# Altium PCB 1-10V_PIR_V1.0.PcbDoc (part 2 of 2)
Units mil, origin at the board's own origin, x right, y up, seen from the top; angles counter-clockwise.
Board outline 1736.22 x 1720.47 mil, 4 copper layers (Top Layer, Layer 1, Layer 2, Bottom Layer), stack 61.811 mil thick; 71 components, 58 nets, 292 pads, 69 vias.
Unrouted connection lines stored in the file: 118.
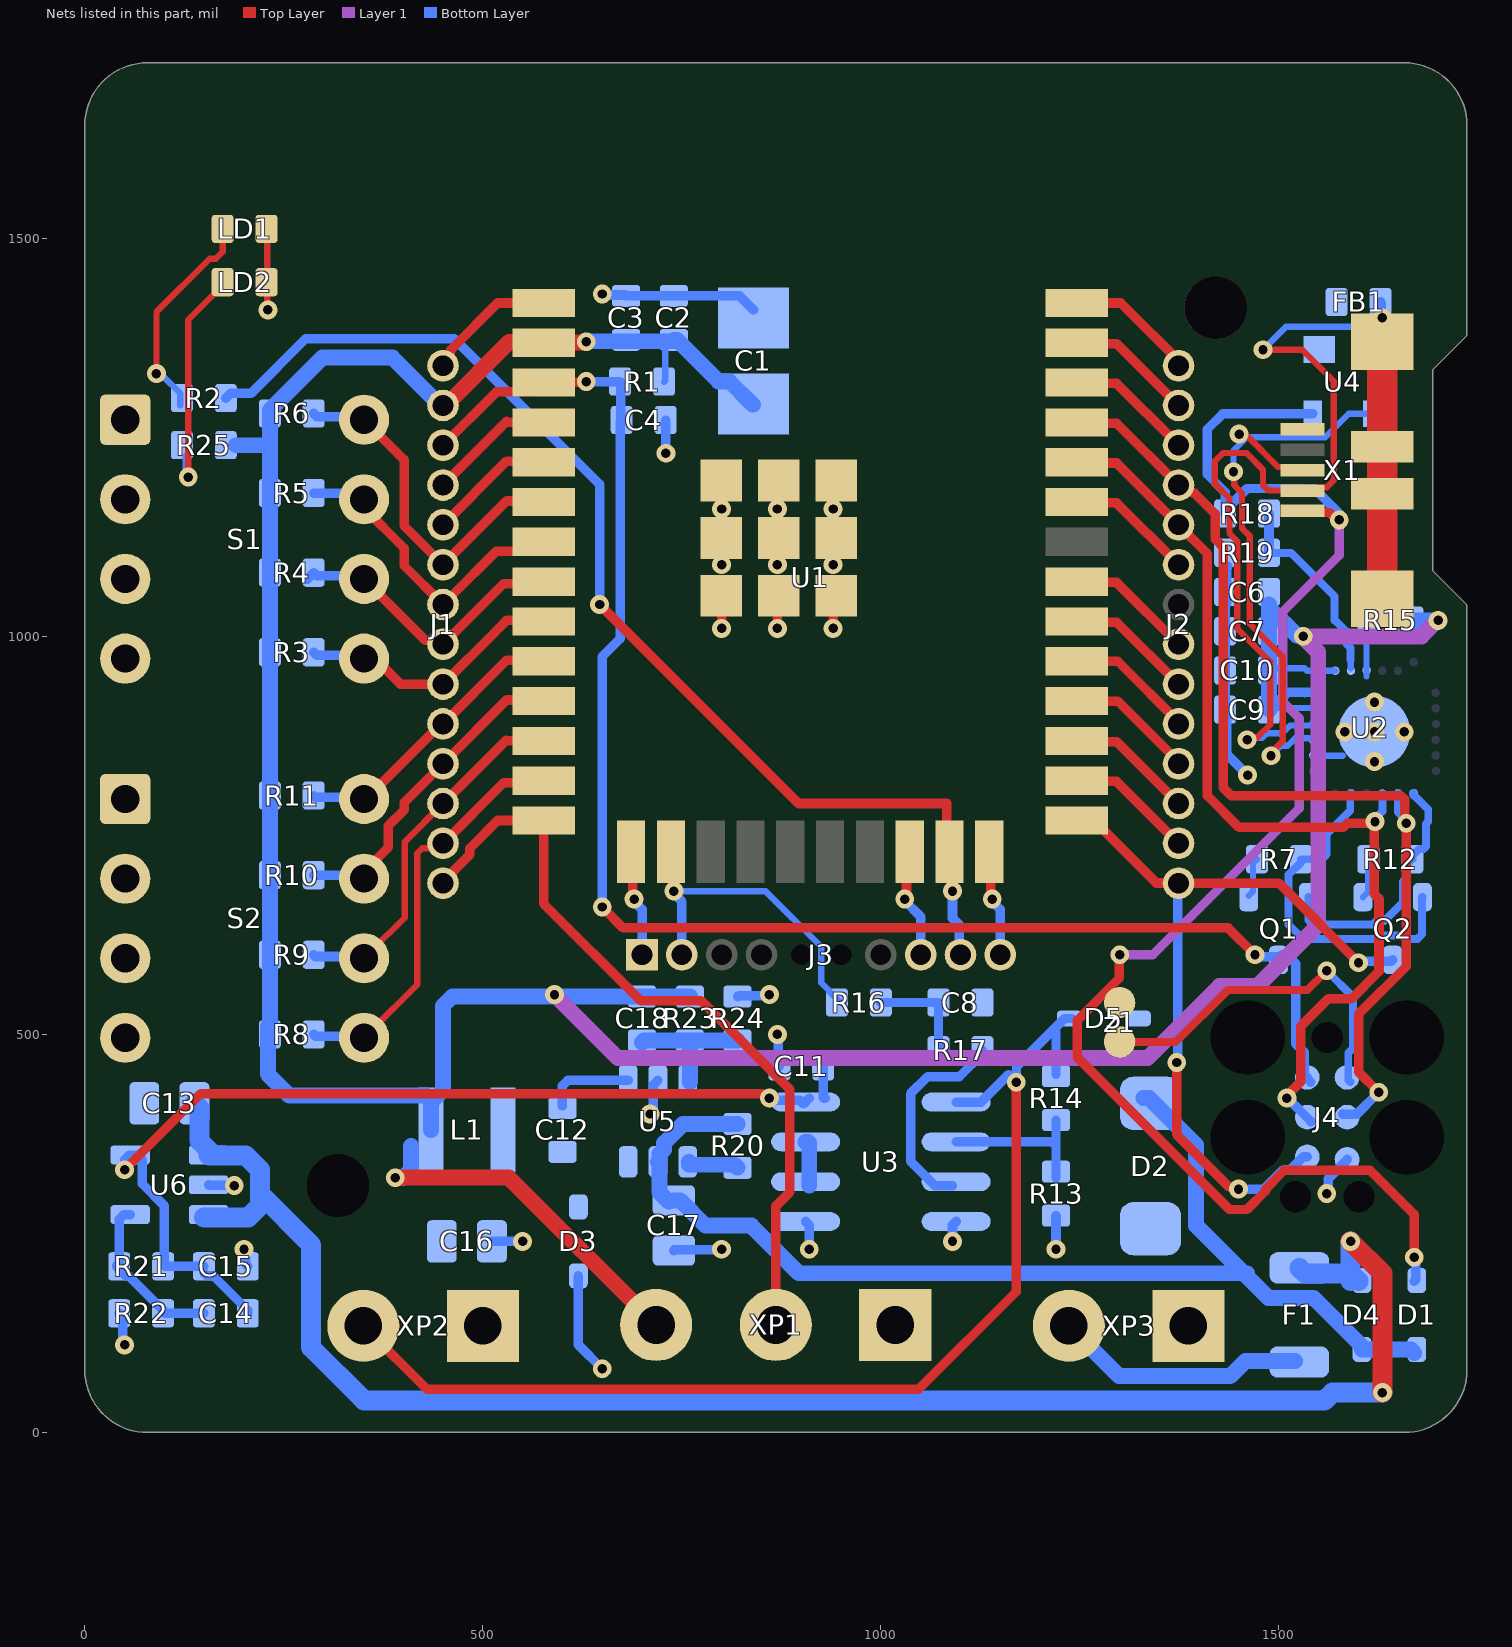
[diagram p4: the nets of this part, all layers, seen from the top]

## Part data (continued)
U4: library part PRTR5V0U2X_Protect, "ESD Protection Device, TVS, 7.5 V, SOT-143B, 4 Pins, 5.5 V, PRTR5", Manufacturer="NXP Semiconductor", Operating Temperature Range="-40C to 80C", Vbr Breakdown Voltage="6Vmin to 9Vmax", Working Voltage=5V, Digikey Link=https://www.digikey.com/product-detail/en/nexperia-usa-inc/PRTR5V0U2X215/1727-3884-1-ND/1589981, ESD Protection="up to 8kV", Farnell Link=http://uk.farnell.com/nexperia/prtr5v0u2x/diode-tvs-dual-sot-143b/dp/1524157?st=PRTR5V0U2X, Manufacturer Part Number=PRTR5V0U2X, Mouser Link=https://eu.mouser.com/ProductDetail/Nexperia/PRTR5V0U2X215?qs=sGAEpiMZZMvKM5ialpXrmha212gV%252bN%252bb, PatternType=SOT143B
U5: "DC-DC Switching Buck (Step Down) Regulator, 3.3V-36V in, 800mV to 28.8V out, 600mA, 2MHz, TSOT-23-6", Manufacturer=MPS, Working Voltage=3.3V-36V, Manufacturer Part Number=MP2451DJ-LF-Z
U6: "LDO, ADJ, 0.15A, Input Voltage Max 38V, -40 TO 125DEG C", Manufacturer=Onsemi, Mouser Part Number=863-NCV8730ASNADJT1G, Working Voltage=2.7V-38V, Arrow Part Number=NCV8730ASNADJT1G, Arrow Price/Stock=https://www.arrow.com/en/products/ncv8730asnadjt1g/on-semiconductor?region=nac, Datasheet Link=https://www.arrow.com/en/products/ncv8730asnadjt1g/on-semiconductor, Height=1.1mm, Manufacturer Part Number=NCV8730ASNADJT1G, Mouser Price/Stock=https://www.mouser.co.uk/ProductDetail/onsemi/NCV8730ASNADJT1G?qs=GedFDFLaBXFZJgT1iqVkOg%3D%3D
X1: "USB Connector, Micro USB Type AB, USB 2.0, Receptacle, 5 Ways, Surface Mount, Right Angle", Manufacturer=GTC, Operating Temperature Range="-30 to 85 ℃", Working Voltage=30VAC/DC, Farnell Link=https://uk.farnell.com/search?st=USB3085, Manufacturer Part Number=USB3085-30-A, PatternType=USB3085-30-A
XP1: library part "MC 1,5/ 3-G-3,81", "Terminal Block, Header, 3.81 mm, 3 Ways, 8 A, 160 V, Through Hole Right Angle", Case="MC 1,5_3-G-3,81", Manufacturer="PHOENIX CONTACT", Permitted current=8A, Temperature="-40 - +105 C", Component Type=Standard, ComponentLink2Description=Datasheet, Manufacturer Part Number="MC 1,5/ 3-G-3,81", Part Number="MC 1,5/ 3-G-3,81", Pb Free=Yes, Pins number=3, Published=14.11.2013, Publisher=dlegkobyt, Status=CHECKED
XP2 XP3: library part "MC 1,5/ 2-G-3,81", "Terminal Block, Header, 3.81 mm, 2 Ways, 8 A, 160 V, Through Hole Right Angle", Case="MC 1,5_2-G-3,81", Manufacturer="PHOENIX CONTACT", Permitted current=8A, Temperature="-40 - +105 C", Component Type=Standard, ComponentLink2Description=Datasheet, Manufacturer Part Number="MC 1,5/ 2-G-3,81", Part Number="MC 1,5/ 2-G-3,81", Pb Free=Yes, Pins number=2, Published=14.11.2013, Publisher=dlegkobyt, Status=CHECKED
z1: library part JUMPER_OPEN

## Free pads (board coordinates)
  round 78.74 hole 78.74 unplated: 11(318.14,310.27) 11(1420.5,1412.63)

## Via types
v1: diameter 23.62, hole 11.81, Top Layer to Bottom Layer, tented both sides, 69 vias

## Nets (pads, with @x,y where several pads share a name; then routed paths per layer and width w, separated by ;. In a path a pad name is that pad's centre, name@x,y a point inside that pad or via, vN(x,y) a via of type N, cw(c..) or ccw(c..) an arc to the next point about the centre after c; other vN are vias at no path point)
1-10V: D5.1 R14.2 U3.1 XP2.2 | length 1413.1
  Top Layer w11.81: XP2.2@350,130 353.86,130 429.45,54.41 1047.57,54.41 1170,176.84 v1(1170,440)
  Bottom Layer w11.81: U3.1@1094.49,415 1125.79,415 1160.39,449.61 ; v1(1170,440) 1170.39,440.39 1170.39,459.61 1230.79,520 D5.1@1236.69,520 D5.1@1240,520 ; R14.2@1220,450 1220,503.31
+3.3VD: C1.1 C2.1 C3.1 C6.1 C7.1 C9.1 C10.1 C16.1 C18.2 J1.2 L1.2 R1.2 R3.2 R4.2 R5.2 R6.2 R8.2 R9.2 R10.2 R11.2 R15.2 R23.2 R25.2 U1.2 U2.5 U2.6 U2.7 XP1.3 | length 4850.6
  Top Layer w20: v1(390,320) 532.7,320 XP1.3@717.72,134.99 ; J1.2@444.65,1290 J1.2@450,1290 453.39,1290 533.39,1370 575.28,1370 U1.2@576.58,1368.69 577.24,1369.35 629.35,1369.35 v1(630,1370)
  Layer 1 w20: v1(590,550) 669.69,470.32 1335.15,470.32 1425.52,560.69 1472.67,560.69 1549.37,637.39 1549.37,980.15 1530,999.52 v1@1530,1000 ; v1(1530.5,1000) 1679.02,1000 1699.02,1020 v1(1700,1020)
  Bottom Layer w8: R1.2@727.56,1320 728.99,1321.43 728.99,1368.99 C2.1@730,1370 ; C9.1@1488.08,907.95 1490.1,909.97 1542.78,909.97 U2.5@1543.23,909.53 ; C10.1@1490,960 1532.09,960 1535.32,956.77 U2.7@1570.79,956.77
  Bottom Layer w12: C9.1@1488.08,907.95 1488.08,911.89 1495.86,919.67 1500.68,919.67 1508.69,927.68 1508.69,930 U2.6@1532.4,930 ; U2.6@1532.4,929.21 U2.6@1532.4,930 ; 1540,930 U2.6@1532.4,930
  Bottom Layer w20: R25.2@190,1240 232.44,1240 ; R8.2@230,510 230,450 256.85,423.15 428.98,423.15 434.72,417.4 L1.2@434.72,414.72 ; R8.2@232.44,510 R9.2@232.44,600 R10.2@232.44,700 R11.2@232.44,800 R3.2@232.44,980 R4.2@232.44,1080 232.44,1240 ; v1(390,320) 400,320 410,330 410,360 ; L1.2@434.72,380 L1.2@434.72,414.72 ; J1.2@450,1290 446.61,1290 386.61,1350 298.5,1350 232.44,1283.94 R6.2@232.44,1280 232.44,1240 ; v1@590,547.56 461.72,547.56 450,535.84 450,430 L1.2@434.72,414.72 ; v1(590,550) 590.98,550 593.42,547.56 C18.2@700,547.56 R23.2@760,547.56 ; v1(630,1370) 630.69,1370.69 C2.1@739.31,1370.69 ; C2.1@740,1372.44 743.94,1372.44 796.26,1320.12 809.88,1320.12 C1.1@839.13,1290.87 ; C6.1@1487.56,1040 1487.56,1036.06 ; C9.1@1488.08,907.95 1488.08,920.07 1487.56,920.59 1487.56,1036.06 ; v1(1530.5,1000) 1529.81,1000.69 1522.93,1000.69 1487.56,1036.06 ; R15.2@1670,1020 v1(1700,1020)
+5V_USB: D1.2 R18.2 U4.4 X1.1 z1.1 | length 1965.9
  Top Layer w11.81: v1(1300,600) 1299.45,599.45 1299.45,570.47 1246.85,517.87 1246.85,471.13 1437.96,280.02 1459.84,280.02 1483.32,303.51 1483.32,305.94 1506.81,329.43 1614.45,329.43 1670,273.88 v1(1670,220) ; X1.1@1529.53,1157.48 1531.5,1155.51 1563.5,1155.51 1572.69,1146.32 v1(1575.89,1146.32)
  Layer 1 w11.81: v1(1300,600) 1341.52,600 1525.59,784.07 1525.59,897.08 1504.91,917.76 1504.91,1030.77 1575.89,1101.75 v1(1575.89,1146.32)
  Bottom Layer w11.81: R18.2@1432.44,1154.17 R18.2@1432.44,1158.11 ; U4.4@1542.6,1279.65 1429.65,1279.65 1410,1260 1410,1203.51 1432.44,1181.06 R18.2@1432.44,1158.11 ; v1@1580,1150 1544.33,1185.67 1460,1185.67 R18.2@1432.44,1158.11 ; D1.2@1670,190 1671.61,191.61 1671.61,218.39 v1(1670,220)
+12V: C11.1 C14.1 C15.1 R21.2 U3.8 U6.5 | length 1261.8
  Top Layer w11.81: v1(50,330) 145.59,425.59 851.21,425.59 856.8,420 v1(860,420)
  Bottom Layer w11.81: v1(50,330) 50,342.52 55.91,348.43 U6.5@57.09,348.43 66.34,348.43 72.24,342.52 72.24,312.29 100,284.54 100,210 101.34,208.66 C15.1@149.61,208.66 ; C15.1@150,200 153.15,196.85 161.42,196.85 204.72,153.54 C14.1@204.72,149.61 ; v1(860,420) 863.2,420 865.94,417.26 898.22,417.26 902.74,412.74 U3.8@910,420 ; C11.1@927.56,460 927.56,420.46 928.02,420 U3.8@930,420
+24V: C13.1 D4.2 F1.2 U6.1 U6.3 | length 2192.2
  Top Layer w25: v1(1590,240) 1630,200 v1(1630,50)
  Bottom Layer w25: C13.1@137.8,413.39 144,407.19 144,366 U6.1@158.54,351.46 ; U6.3@150,270 205.36,270 220,284.64 220,300 ; U6.1@155.51,348.43 156.2,347.74 202.26,347.74 220,330 220,300 ; F1.2@1525.59,206.69 1532.78,199.51 1590,199.51 ; 1590,190 1590,199.51 ; v1(1590,240) 1590,199.51 ; D4.2@1595,195 D4.2@1600,190 ; v1(1630,50) 1567.14,50 1557.48,40.33 350.68,40.33 284.35,106.67 284.35,235.65 220,300
+24V_IN: F1.1 XP3.2 | length 317.9
  Bottom Layer w20: XP3.2@1236.22,133.86 1299.37,70.71 1438.9,70.71 1458.19,90 F1.1@1520,90
ADJ: C14.2 R21.1 R22.2 U6.4 | length 206.7
  Bottom Layer w11.81: R21.1@40,210 40,208.03 51.18,196.85 55.12,196.85 R22.2@98.43,153.54 ; R21.1@43.31,210 43.31,267.72 49.21,273.62 U6.4@57.09,273.62 ; R22.2@100,150 100.39,149.61 C14.2@149.61,149.61
BOOT: J2.14 J4.6 Q2.3 U1.25 | length 999
  Top Layer w12: U1.25@1245.87,768.69 1267.53,768.69 1346.04,690.19 J2.14@1383.92,690.19 ; v1(1371.55,464.73) 1371.55,374.41 1438.12,307.83 1447.01,307.83 v1(1449.24,305.61) ; J2.14@1383.92,690 1500,690 v1(1600,590)
  Bottom Layer w12: J2.14@1370,690 1372.73,687.27 1372.73,465.92 v1(1371.55,464.73) ; v1(1449.24,305.61) 1480.92,305.61 1504.83,329.52 1513.92,329.52 1530.46,346.06 J4.6@1535.63,346.06 ; v1(1600,590) 1601.83,591.83 1641.06,591.83 Q2.3@1642.89,593.66
BST: C12.2 U5.1 | length 110.9
  Bottom Layer w11.81: C12.2@600,410 600,435.44 606.92,442.36 U5.1@682.6,442.36
DTR: Q2.2 R7.2 U2.23 | length 438.9
  Bottom Layer w10: U2.23@1590.47,803.23 1590.47,803.06 1589.57,802.15 1589.57,781.16 1560,751.6 1560,725.86 1554.14,720 R7.2@1527.56,720 1527.56,716.06 1512.29,700.79 1512.29,637.71 1530,620 1624.98,620 1629.2,624.22 1656.57,624.22 1660.79,620 1674.14,620 1680,625.86 Q2.2@1680,670 ; Q2.2@1680,672.4 Q2.2@1680.29,672.37
EN: C4.1 J1.3 J4.2 Q1.3 R1.1 U1.3 | length 1991.7
  Top Layer w12: J1.3@440,1240 J1.3@445,1245 ; J1.3@450,1240 516.98,1306.98 564.87,1306.98 U1.3@576.58,1318.69 577.24,1319.35 629.35,1319.35 v1(630,1320) ; v1(650,660) 676.24,633.76 1436.24,633.76 v1(1470,600)
  Bottom Layer w12: v1(630,1320) R1.1@670,1320 ; v1(650,660) 650,974.49 672.44,996.93 672.44,1269.66 C4.1@674.46,1271.68 673.45,1272.69 673.45,1318.99 R1.1@672.44,1320 ; v1(1470,600) 1472.22,597.78 1497.28,597.78 1499.57,595.49 1504.09,600 1510,600 1521.26,588.74 1521.26,488.12 1531.97,477.4 1531.97,449.72 J4.2@1535.63,446.06 ; J4.2@1534.78,445.22 J4.2@1540,440
EN1: R20.2 U5.4 | length 66.1
  Bottom Layer w20: U5.4@759.21,340 759.21,336.22 816.22,336.22 R20.2@820,332.44
FB: C18.1 R23.1 R24.1 U5.3 | length 173.5
  Bottom Layer w20: C18.1@700,490 702.44,492.44 R23.1@760,492.44 ; U5.3@760,440 R23.1@760,492.44 ; R24.1@820,492.44 R23.1@760,492.44
GND: C1.2 C2.2 C3.2 C4.2 C6.2 C7.2 C8.2 C9.2 C10.2 C11.2 C13.2 C15.2 C16.2 C17.2 D2.1 D3.2 D5.2 FB1.1 J1.1 J2.1 J4.5 LD1.1 LD2.1 R13.1 R19.1 R22.1 R24.2 S1.1 S1.2 S1.3 S1.4 S2.1 S2.2 S2.3 S2.4 U1.1 U1.38 U1.39 U2.2 U2.25 U3.4 U3.5 U4.1 U5.2 U6.2 X1.5 XP1.1 XP2.1 XP3.1 | length 1947.6
  Top Layer w8: LD1.1@228.35,1511.81 229.17,1510.98 229.17,1410.83 v1(230,1410)
  Top Layer w12: J1.1@440,1340 J1.1@445,1345 ; J1.1@450,1340 450,1347.51 460,1357.51 460,1360 518.69,1418.69 U1.1@576.58,1418.69 ; U1.39@799.61,1051.17 800,1050.79 v1(800,1010) ; U1.39@799.61,1123.42 800,1123.03 v1(800,1090) ; U1.39@799.61,1195.66 800,1195.28 v1(800,1160) ; v1(870,1010) 870,1049.32 U1.39@871.86,1051.17 ; v1(870,1090) 870,1121.56 U1.39@871.86,1123.42 ; v1(870,1160) 870,1193.8 U1.39@871.86,1195.66 ; v1(940,1010) 940,1047.07 U1.39@944.1,1051.17 ; v1(940,1090) 940,1119.32 U1.39@944.1,1123.42 ; v1(940,1160) 940,1191.56 U1.39@944.1,1195.66 ; U1.38@1245.87,1418.69 1301.31,1418.69 J2.1@1380,1340
  Bottom Layer w8: U2.2@1542.76,850 1542.99,850.24 1543.23,850 1580,850
  Bottom Layer w12: R22.1@43.31,149.61 47.78,145.14 47.78,112.22 v1(50,110) ; U6.2@155.51,311.02 156.02,310.51 187.3,310.51 v1(187.82,310) ; v1(200,230) 202.22,227.78 202.22,211.16 C15.2@204.72,208.66 ; C16.2@511.5,240 v1(550,240) ; D3.2@620,196.69 620,110 v1(650,80) ; v1(650,1430) 651.22,1428.78 678.78,1428.78 C3.2@680,1427.56 C2.2@740,1427.56 822.44,1427.56 C1.2@840,1410 ; v1(710,400) 710,403.14 714.19,407.33 714.19,436.55 U5.2@720,442.36 ; C4.2@729.58,1271.68 729.79,1271.47 729.79,1230.21 v1(730,1230) ; C17.2@740,228.5 740.75,229.25 799.25,229.25 v1(800,230) ; R24.2@820,547.56 821.22,548.78 858.78,548.78 v1(860,550) ; v1(870,500) 871.22,498.78 871.22,461.22 C11.2@872.44,460 ; U3.5@905.51,265 910,260.51 v1(910,230) ; v1(1090,240) 1090,260.51 U3.4@1094.49,265 ; v1(1220,230) R13.1@1220,272.44 ; R19.1@1435.96,1087.74 1434.2,1085.98 1434.2,1041.76 1432.44,1040 1432.44,960 1432.7,959.74 1432.7,908.22 1434.31,906.6 1434.31,852.01 v1(1460.64,825.69) ; v1(1560,300) 1562.22,302.22 1562.22,318.87 1585.63,342.28 J4.5@1585.63,342.91
  other v1: 1620,842.6 1582.6,880 1620,880 1657.4,880 1620,917.4
IN: R13.2 R14.1 U3.2 | length 200
  Bottom Layer w11.81: U3.2@1094.49,365 1215,365 1220,360 ; R13.2@1220,320 R13.2@1220,327.56 1220,360 ; R14.1@1220,392.44 1220,360
IO2: J3.10 U1.24 | length 135
  Top Layer w12: U1.24@1136.23,729.32 1138.11,727.44 1138.11,671.89 v1(1140,670)
  Bottom Layer w12: v1(1140,670) 1140,666.86 1150,656.86 J3.10@1150,600
IO4: J2.13 U1.26 | length 160.6
  Top Layer w12: U1.26@1245.87,818.69 1246.87,817.7 1296.22,817.7 J2.13@1373.92,740
IO5: J2.10 U1.29 | length 162.9
  Top Layer w12: U1.29@1245.87,968.69 1297.49,968.69 J2.10@1376.18,890
IO16: J2.12 U1.27 | length 160.6
  Top Layer w12: U1.27@1245.87,868.69 1246.87,867.7 1296.22,867.7 J2.12@1373.92,790
IO17: J2.11 U1.28 | length 162.9
  Top Layer w12: U1.28@1245.87,918.69 1297.49,918.69 J2.11@1376.18,840
IO18: J2.9 U1.30 | length 160.6
  Top Layer w12: U1.30@1245.87,1018.69 1246.87,1017.7 1296.22,1017.7 J2.9@1373.92,940
IO19: J2.8 U1.31 | length 160.6
  Top Layer w12: U1.31@1245.87,1068.69 1246.87,1067.7 1296.22,1067.7 J2.8@1373.92,990
IO21: J2.6 U1.33 | length 160.6
  Top Layer w12: U1.33@1245.87,1168.69 1246.87,1167.7 1296.22,1167.7 J2.6@1373.92,1090
IO22: J2.3 U1.36 | length 164.5
  Top Layer w12: U1.36@1245.87,1318.69 1246.87,1317.7 1296.22,1317.7 1370,1243.92 J2.3@1370,1240 ; J2.3@1378.92,1245 1380,1243.92 J2.3@1380,1240
IO23: J2.2 U1.37 | length 160.6
  Top Layer w12: U1.37@1245.87,1368.69 1246.87,1367.7 1296.22,1367.7 J2.2@1373.92,1290
NetC17_1: C17.1 D1.1 D2.2 D4.1 R20.1 U5.5 | length 1472.9
  Bottom Layer w20: U5.5@720,340 721.81,338.19 721.81,316.37 721.81,301.81 C17.1@733.62,290 ; U5.5@721.81,340 721.81,349.69 727.72,355.59 727.72,363.63 751.65,387.56 R20.1@820,387.56 ; C17.1@740,291.5 747.87,291.5 779.68,259.69 837.35,259.69 897.03,200 1455.68,200 ; D2.2@1330,420 1336.89,420 1396,360.89 1396,259.68 1455.68,200 ; 1457.84,197.84 1486.55,169.13 1543.46,169.13 1604.33,108.27 D4.1@1604.33,104.33 1665.67,104.33 D1.1@1670,100 ; 1460,200 1455.68,200
NetFB1_2: FB1.2 X1.6 X1.7 X1.8 X1.9 | length 343.8
  Top Layer w38: X1.6@1629.92,1047.24 X1.7@1629.92,1179.13 X1.8@1629.92,1238.19 1629.92,1369.92 X1.9@1630,1370
  Bottom Layer w12: FB1.2@1627.56,1420 1628.78,1418.78 1628.78,1401.22 v1(1630,1400)
NetJ1_4: J1.4 U1.4 | length 170.7
  Top Layer w12: J1.4@440,1190 J1.4@445,1195 ; J1.4@450,1190 530,1270 ; 530,1268.69 U1.4@560,1268.69 ; U1.4@560,1270 561.31,1268.69 U1.4@576.58,1268.69 ; U1.4@576.58,1270 U1.4@580,1270
NetJ1_5: J1.5 U1.5 | length 160.3
  Top Layer w12: J1.5@450,1140 530,1220 575.28,1220 U1.5@576.58,1218.69
NetJ3_1: J3.1 U1.15 | length 125
  Top Layer w12: U1.15@686.23,729.32 688.11,727.44 688.11,671.89 v1(690,670)
  Bottom Layer w12: v1(690,670) 690,666.86 700,656.86 J3.1@700,610
NetJ3_8: J3.8 U1.22 | length 140.2
  Top Layer w12: v1(1030,670) 1032.22,672.22 1032.22,725.32 U1.22@1036.23,729.32
  Bottom Layer w12: v1(1030,670) 1030,667.84 1050,647.84 J3.8@1050,600
NetJ4_1: J4.1 z1.2 | length 454.4
  Top Layer w10: z1.2@1300,490.63 1370.87,490.63 1435.93,555.69 1535.69,555.69 v1(1560,580)
  Bottom Layer w10: v1(1560,580) 1593.09,546.91 1593.09,482.62 1587.09,476.61 1587.09,442.91 J4.1@1590,440
NetLD1_2: LD1.2 R2.1 | length 276.1
  Top Layer w7.87: v1(90,1330) 90,1407.43 156.98,1474.41 164.41,1474.41 173.23,1483.23 LD1.2@173.23,1511.81
  Bottom Layer w7.87: v1(90,1330) 93.01,1326.99 98.21,1326.99 120,1305.2 R2.1@120,1290
NetLD2_2: LD2.2 R25.1 | length 295.3
  Top Layer w7.87: v1(130,1200) 130,1397.72 173.23,1440.94 LD2.2@173.23,1444.88
  Bottom Layer w7.87: v1(130,1200) 126.99,1203.01 126.99,1226.99 R25.1@130,1230
NetQ1_1: Q1.1 R7.1 | length 50
  Bottom Layer w7.87: Q1.1@1462.17,674.23 1467.31,679.36 1467.31,714.87 R7.1@1472.44,720
NetQ2_1: Q2.1 R12.1 | length 51.2
  Bottom Layer w7.87: Q2.1@1605.48,672.37 1611.86,678.77 1611.86,702.93 1613.26,704.34 1613.26,719.18 R12.1@1612.44,720
NetU3_6: U3.6 U3.7 | length 58.5
  Bottom Layer w20: U3.7@905.51,365 908.33,365 910,363.33 U3.6@910,310
NIN: R17.1 U3.3 | length 265.3
  Bottom Layer w11.81: U3.3@1090,310 1067.99,310 1037.4,340.59 1037.4,425.6 1058.7,446.89 1098.39,446.89 1127.56,476.06 R17.1@1127.56,480
PIR: J1.14 U1.14 XP1.2 | length 990.8
  Top Layer w12: J1.14@450,690 450,692.26 483.76,726.02 483.76,733.76 518.69,768.69 U1.14@576.58,768.69 576.58,664.03 698.28,542.34 773.99,542.34 885.69,430.64 885.69,302.23 868.11,284.65 868.11,133.26 XP1.2@875.69,125.69
PWM: J3.2 R16.1 U1.16 | length 430.1
  Top Layer w12: U1.16@736.23,729.32 738.11,727.44 738.11,681.89 v1(740,680)
  Bottom Layer w8: v1(740,680) 855.17,680 925,610.17 925,565 935.19,554.81 935.19,553.71 948.89,540 R16.1@950,540
  Bottom Layer w12: v1(740,680) 740,676.86 750,666.86 J3.2@750,600
R\S\T\: R15.1 U2.9 | length 71
  Bottom Layer w7.87: 1610,950 1610,1017.56 R15.1@1612.44,1020
RC: C8.1 R16.2 R17.2 | length 135.6
  Bottom Layer w11.81: R16.2@1000,540 C8.1@1072.44,540 1072.44,487.56 R17.2@1080,480
RTS: Q1.2 R12.2 U2.19 | length 318.5
  Bottom Layer w10: Q1.2@1536.98,672.37 1536.98,643.73 1542.83,637.87 1617.58,637.87 1621.8,642.09 1632.09,642.09 1655.6,665.6 1655.6,691.96 1660.46,696.81 1660.46,712.9 R12.2@1667.56,720 ; R12.2@1667.56,723.94 1676.34,732.72 1681.68,732.72 1684.69,735.72 1684.69,764.4 1687.56,767.27 1687.56,782.44 U2.19@1670,800 ; U2.19@1669.21,800 U2.19@1669.21,803.23
ST_LED: J3.9 R2.2 U1.23 | length 1455
  Top Layer w12: v1(646.76,1040) 896.76,790 1082.97,790 1082.97,747.03 U1.23@1090,740 ; U1.23@1086.23,729.32 1088.11,727.44 1088.11,681.89 v1(1090,680)
  Bottom Layer w12: R2.2@177.17,1299.21 183.15,1305.2 208.95,1305.2 277.62,1373.87 463.86,1373.87 646.76,1190.98 v1(646.76,1040) ; v1(1090,680) 1090,646.07 1098.19,637.88 1098.19,601.81 J3.9@1100,600
SW: C12.1 D3.1 L1.1 U5.6
SW1.1: J1.6 R6.1 S1.8 U1.6 | length 436.6
  Top Layer w12: S1.8@350.79,1272.05 401.3,1221.53 401.3,1138.7 440.93,1099.07 440.93,1090.93 J1.6@440,1090 ; J1.6@450,1090 530,1170 575.28,1170 U1.6@576.58,1168.69
  Bottom Layer w12: R6.1@287.56,1280 291.54,1276.02 333.98,1276.02 S1.8@340,1270
SW1.2: J1.7 R5.1 S1.7 U1.7 | length 403.9
  Top Layer w12: S1.7@350.79,1172.05 350.79,1161.11 401.3,1110.59 401.3,1088.7 J1.7@450,1040 J1.7@450,1030 ; J1.7@460,1040 459.07,1040.93 459.07,1049.07 516.98,1106.98 564.87,1106.98 U1.7@576.58,1118.69
  Bottom Layer w12: R5.1@287.56,1180 327.23,1180 340,1167.23 S1.7@340,1160
SW1.3: J1.8 R4.1 S1.6 U1.8 | length 360.1
  Top Layer w12: S1.6@350.79,1072.05 427.52,995.31 444.69,995.31 J1.8@450,990 526.24,1066.24 574.13,1066.24 U1.8@576.58,1068.69
  Bottom Layer w12: R4.1@279.78,1072.05 287.56,1079.83 R4.1@287.56,1080 291.54,1076.02 333.98,1076.02 S1.6@340,1070
SW1.4: J1.9 R3.1 S1.5 U1.9 | length 346.3
  Top Layer w12: S1.5@350.79,972.05 364.59,972.05 396.63,940 J1.9@440,940 ; J1.9@445,945 J1.9@440,940 ; 516.98,1006.98 J1.9@450,940 J1.9@440,940 ; 520,1010 530,1020 575.28,1020 U1.9@576.58,1018.69
  Bottom Layer w12: R3.1@287.56,980 291.54,976.02 333.98,976.02 S1.5@350,960
SW2.1: J1.10 R11.1 S2.8 U1.10 | length 372.2
  Top Layer w12: S2.8@350.79,795.67 353.23,795.67 447.56,890 J1.10@450,890 530,970 575.28,970 U1.10@576.58,968.69 ; J1.10@440,890 J1.10@445,895
  Bottom Layer w12: R11.1@287.56,800 289.72,797.83 342.17,797.83 S2.8@350,790
SW2.2: J1.11 R10.1 S2.7 U1.11 | length 396.5
  Top Layer w12: S2.7@350.79,695.67 350.79,704.38 381.43,735.03 381.43,762.15 401.3,782.02 401.3,791.3 J1.11@450,840 530,920 575.28,920 U1.11@576.58,918.69
  Bottom Layer w12: R10.1@287.56,700 327.23,700 330,697.23 S2.7@330,690
SW2.3: J1.12 R9.1 S2.6 U1.12 | length 462.8
  Top Layer w8: S2.6@360,600 360,604.88 401.74,646.62 401.74,741.74 J1.12@450,790
  Top Layer w12: S2.6@350.79,595.67 S2.6@357.56,602.44 ; J1.12@450,790 529.35,869.35 ; 530,868.69 558.69,868.69 U1.12@560,870 ; U1.12@560,868.69 U1.12@576.58,868.69
  Bottom Layer w12: R9.1@287.56,600 289.72,597.83 342.17,597.83 S2.6@350,590
SW2.4: J1.13 R8.1 S2.5 U1.13 | length 504.8
  Top Layer w8: S2.5@360,500 360,504.88 417.61,562.5 417.61,727.61 423.92,733.92 443.92,733.92 J1.13@450,740
  Top Layer w12: J1.13@450,740 526.24,816.24 574.13,816.24 U1.13@576.58,818.69
  Bottom Layer w12: R8.1@287.56,500 289.72,497.83 332.17,497.83 S2.5@340,490
USB_N: U2.4 U4.2 X1.2 | length 1082.2
  Top Layer w7.87: 1420,1190 1419.26,1190.74 1419.26,1219.7 1430,1230.43 1458.94,1230.43 1480,1209.37 1480,1190 1486.93,1183.07 X1.2@1529.53,1183.07 1533.46,1187.01 1560.01,1187.01 1568.9,1195.9 1568.9,1320.34 1529.24,1360 v1(1480,1360) ; 1420.73,1190.73 1437.81,1173.64 1437.81,1129.4 1447.69,1119.53 1447.69,1009.44 1489.13,968 1489.13,889.18 1472.96,873.01 1463.01,873.01 v1(1460,870)
  Bottom Layer w7.87: v1(1460,870) 1462.57,872.57 1479.16,872.57 1485.02,878.43 1504.33,878.43 1513.78,887.87 1540.51,887.87 1542.48,889.84 U2.4@1543.23,889.84 ; v1(1480,1360) 1508.9,1388.9 1607.7,1388.9 1609.53,1387.07 1609.53,1370.47 U4.2@1620,1360
USB_P: U2.3 U4.3 X1.3 | length 781.4
  Top Layer w7.87: v1(1442.88,1206.81) 1443.73,1205.97 1443.73,1190 1453.56,1180.17 1453.56,1135.92 1463.43,1126.05 1463.43,1015.96 1504.88,974.52 1504.88,868.53 1490,853.65 v1(1490,850) ; v1(1450,1254.06) 1453.01,1251.04 1460.6,1251.04 1499.04,1212.6 1525.59,1212.6 X1.3@1529.53,1208.66
  Bottom Layer w7.87: v1(1442.88,1206.81) 1442.88,1233.24 v1@1459.82,1250.18 ; v1(1450,1254.06) 1453.01,1251.04 1458.96,1251.04 v1@1459.82,1250.18 ; v1(1490,850) 1490,850.19 1502.49,862.68 1510.86,862.68 1520.31,872.13 1539.91,872.13 1541.87,870.16 U2.3@1542.62,870.16 ; U4.3@1617.4,1279.65 1587.84,1279.65 1558.2,1250 1460,1250 v1@1459.82,1250.18
USB_RxD: J2.4 J4.3 U1.35 U2.20 | length 1305.9
  Top Layer w12: U1.35@1245.87,1268.69 1246.87,1267.7 1296.22,1267.7 J2.4@1373.92,1190 1381.43,1190 1391.31,1180.12 1393.61,1180.12 1420,1153.73 1420,1122.02 1429.87,1112.15 1429.87,810.13 1440,800 1652.97,800 1657.84,795.13 v1@1657.84,770.69 ; v1(1625.38,427.38) 1600,452.76 1600,525.57 1660,585.57 v1(1660,765.32)
  Bottom Layer w10: U2.20@1649.53,803.23 1649.53,779.48 1660,769.01 v1(1660,765.32) v1@1660,760
  Bottom Layer w12: J4.3@1580,400 1580.28,399.72 1594.45,399.72 1594.74,400 1598,400 v1(1625.38,427.38)
USB_TxD: J2.5 J4.4 U1.34 U2.21 | length 1226
  Top Layer w12: U1.34@1245.87,1218.69 1246.87,1217.7 1296.22,1217.7 J2.5@1373.92,1140 1410,1103.92 1410,800 1450,760 1580.77,760 1586.09,765.32 v1@1614.68,765.32 ; v1(1510,420) 1510,423.14 1527.17,440.31 1527.17,509.92 1561.89,544.64 1590.97,544.64 1625.69,579.36 1625.69,670.27 1620,675.95 v1@1620,760
  Bottom Layer w10: v1@1620,770 1620,770.4 1629.84,780.24 U2.21@1629.84,802.62
  Bottom Layer w12: v1(1510,420) 1510.85,420 1540,390.85 J4.4@1540,390
  other v1: 1620.63,767.35
VBUS: R18.1 R19.2 U2.8 | length 253.2
  Bottom Layer w8: U2.8@1590,960 1590,970
  Bottom Layer w10: R19.2@1487.56,1104.93 1515.07,1104.93 1570,1050 1570,1020.53 ; 1570,1020 1570,1020.53 ; 1590,970 1590,985.26 1585.79,989.48 1585.79,1004.74 1570,1020.53
  Bottom Layer w12: R19.2@1487.56,1104.93 R18.1@1487.56,1154.17
pads on no net: J2.7 J3.3 J3.4 J3.5 J3.6 J3.7 J4.0 U1.17 U1.18 U1.19 U1.20 U1.21 U1.32 U2.1 U2.10 U2.11 U2.12 U2.13 U2.14 U2.15 U2.16 U2.17 U2.18 U2.22 U2.24 X1.4

## Polygon pours and split planes (outlines as drawn)
GND on Layer 2 "GND_L_2" (solid, remove dead copper, pour order 0): 0,-20 20,-40 1740,-40 1740,1720 1720,1740 0,1740 0,1690
GND on Top Layer "GND_L_T" (solid, pour order 1): -50,1760 -50,-60 1780,-60 1800,-40 1780,-20 1780,1770 -40,1770
GND on Bottom Layer "GND_L_2" (solid, remove dead copper, pour order 2): -30,1720 -30,-30 1720,-30 1750,0 1750,1740 -60,1740 -70,1730
GND on Layer 1 "GND_L_1" (solid, remove dead copper, pour order 3): -40,1710 -40,-40 1710,-40 1740,-10 1740,1730 -70,1730 -80,1720

## Keep-outs
Keep-Out Layer:
  region: -50,1730 1750,1730 1770,1710 1770,1480 1760,1470 1270,1470 1260,1460 260,1460 260,1550 240,1550 220,1550 -40,1550
  lines w7.87: 0,78.74 ccw(c78.74,78.74) 78.74,0 1657.48,0 ccw(c1657.48,78.74) 1736.22,78.74 1736.22,1039.37 1692.91,1082.68 1692.91,1334.65 1736.22,1377.95 1736.22,1641.73 ccw(c1657.48,1641.73) 1657.48,1720.47 78.74,1720.47 ccw(c78.74,1641.73) 0,1641.73 0,78.74

## Other copper
Top Layer:
  region net GND: 1557.09,1251.97 1557.09,1315.45 1549.7,1322.83 1508.76,1322.83 1502.01,1316.08 1502.01,1251.97
Bottom Layer:
  rectangle net +3.3VD: 390,200 460,450
  region net SW: 550,450 510,450 510,290 550,290
  region net SW: 690,350 530,350 520,340 520,290 690,290

## Silkscreen, mask and mechanical layers (free items; w line width, h text height)
Top Overlay:
  circle w7.87: c59.06,370.08 r27.56
  circle w7.87: c59.06,1397.64 r15.75
  region: 43.31,1397.64 ccw(c59.06,1397.64) 59.06,1381.89 ccw(c59.06,1397.64) 74.8,1397.64 74.8,1401.57 ccw(c62.99,1401.57) 62.99,1413.39 59.06,1413.39 ccw(c59.06,1397.64)
  lines w7.87: 23.62,1397.64 31.5,1397.64 ; 31.5,1370.08 39.37,1377.95 ; 31.5,1425.2 39.37,1417.32 ; 59.06,398.89 59.06,370.08 86.61,370.08 ; 59.06,1362.2 59.06,1370.08 ; 59.06,1425.2 59.06,1433.07 ; 78.74,1377.95 86.61,1370.08 ; 79.73,1418.31 87.6,1426.18 ; 86.61,1397.64 94.49,1397.64 ; 240.55,190.94 240.55,295.28 608.66,295.28 ; 423.62,190.94 423.62,295.28 ; 608.66,190.94 608.66,295.28 ; 781.89,192.91 781.89,295.28 ; 955.12,192.91 955.12,295.28 ; 1128.35,192.07 1128.35,295.28 ; 1311.42,190.94 1311.42,295.28 ; 1496.46,190.94 1496.46,295.28 1128.35,295.28 ; 608.66,295.28 1128.35,295.28
  text "© Copyright   / Thermalimage" at 90,1560 h59.06
  text "Status" at 267.72,1492.13 h31.5
  text "+3.3VD" at 267.72,1425.2 h31.5
  text "GND" at 438.41,208.65 h51.18
  text "PIR" at 781.89,209.12 h51.18
  text "GND" at 965.51,209.12 h51.18
  text "24V" at 1141.17,208.65 h51.18
  text "GND" at 1326.21,208.65 h51.18
  text "3.3V" at 608.66,192.91 h39.37
  text "1-10V" at 240.16,190.94 h35.43
Bottom Overlay:
  drawing of 3634 lines, arcs and shapes, not listed
  text "1-10V PIR REV A" at 1004.17,1628.43 h39.37
  text "'.ModifiedDate'" at 930,1560 h66.93
Mechanical 1:
  the board outline again, w7.87
Mechanical 3:
  drawing of 1969 lines, arcs and shapes, not listed
  text "1" at 612.95,6.42 h137.8 r90
Mechanical 13:
  text "Assembly Top Layer" at -173.23,1811.02 h118.11
  text ".Pcb_File_Name_No_Path" at 397.76,-273.58 h47.24
Mechanical 14:
  text "Assembly Bottom Layer" at 2078.74,1811.02 h118.11
  text ".Pcb_File_Name_No_Path" at 1311.02,-78.74 h47.24
Mechanical 15:
  lines w7.87: 5.91,1316.93 538.89,1316.93 ; 1692.91,1062.99 1692.91,1354.33

## Dimensions
78.74,0 to 78.74,1720.47 on Mechanical 2
0,78.74 to 1736.22,78.74 on Mechanical 2